# Altium PCB Flir_PCB.PcbDoc
Units mm, origin at the board's own origin, x right, y up, seen from the top; angles counter-clockwise.
Board outline 30 x 30 mm, 2 copper layers (Top Layer, Bottom Layer); 10 components, 38 nets, 108 pads, 35 vias.
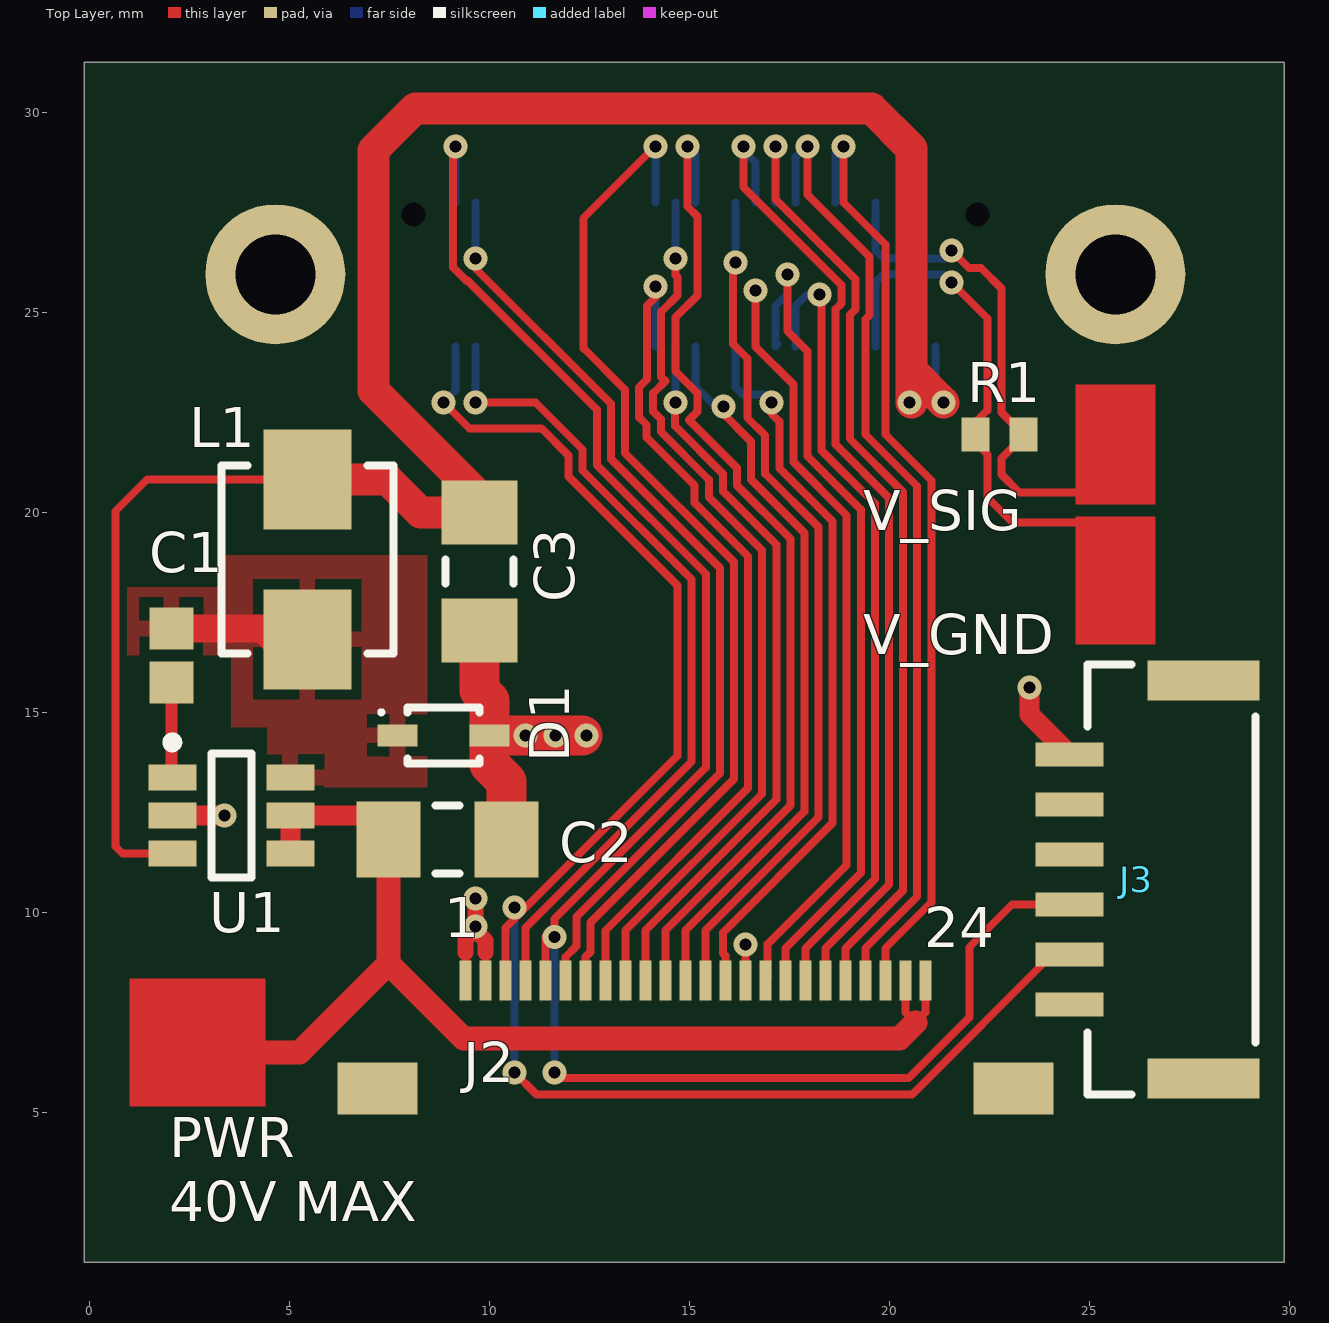
[diagram p0: Top Layer view]
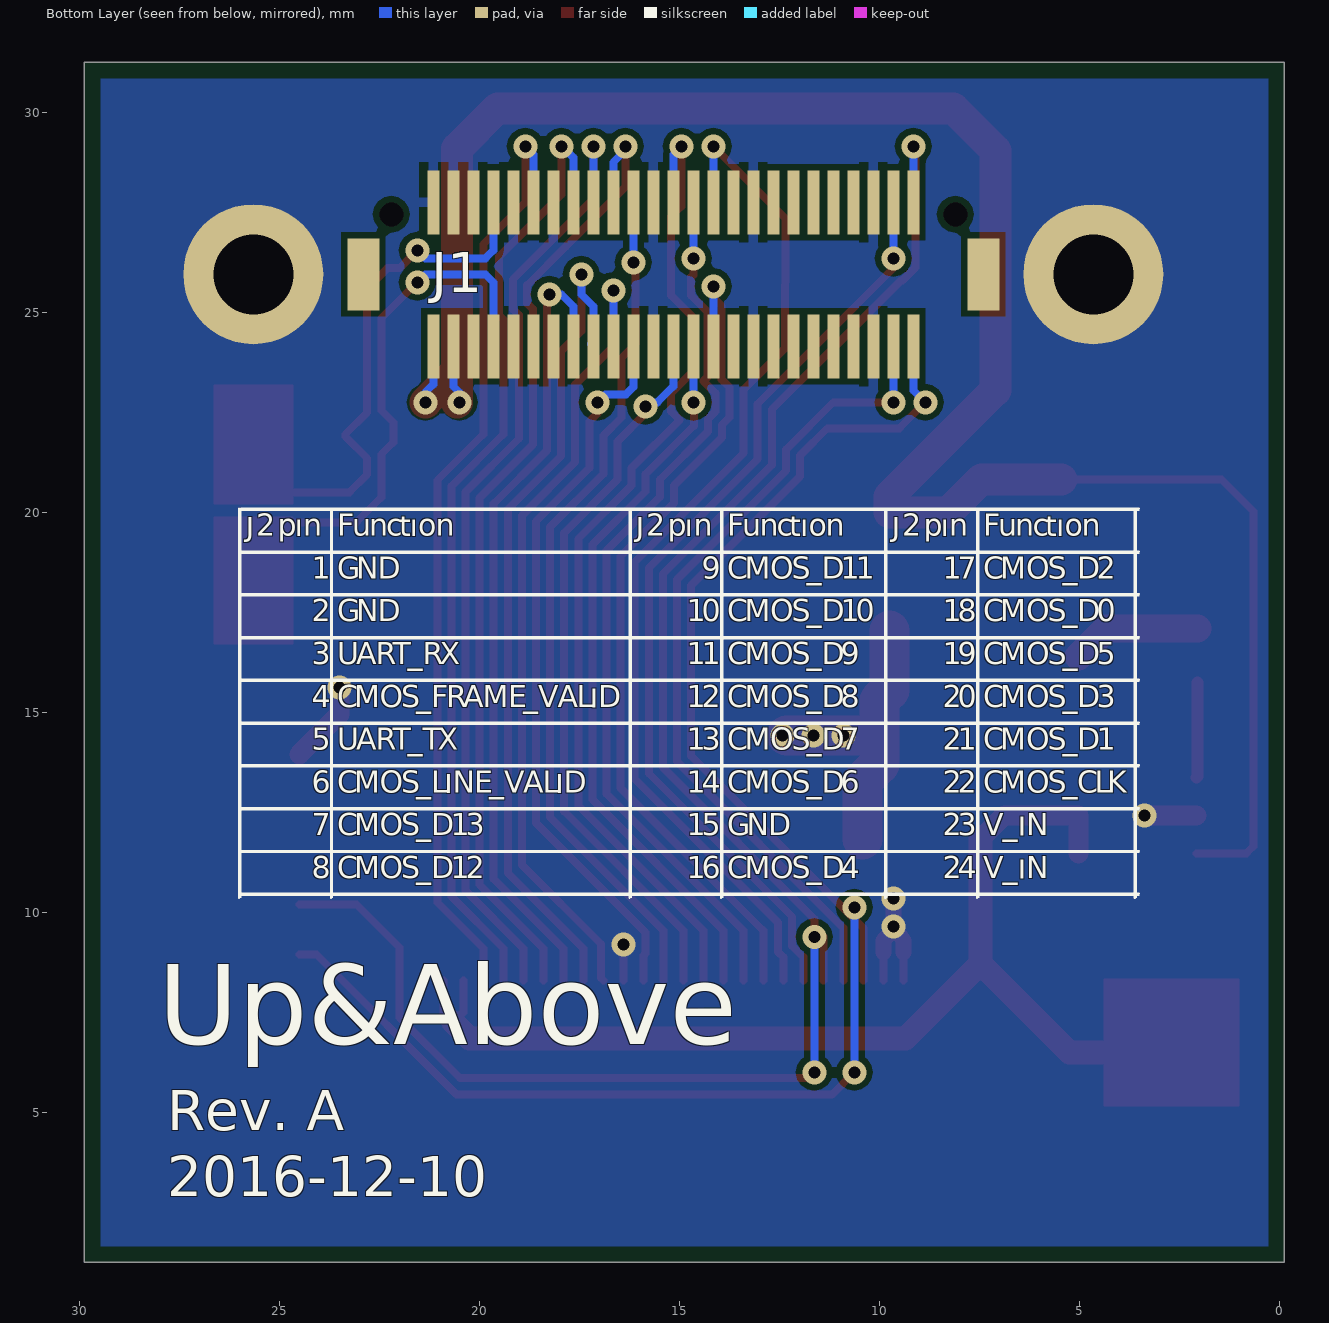
[diagram p1: Bottom Layer view, seen from below]
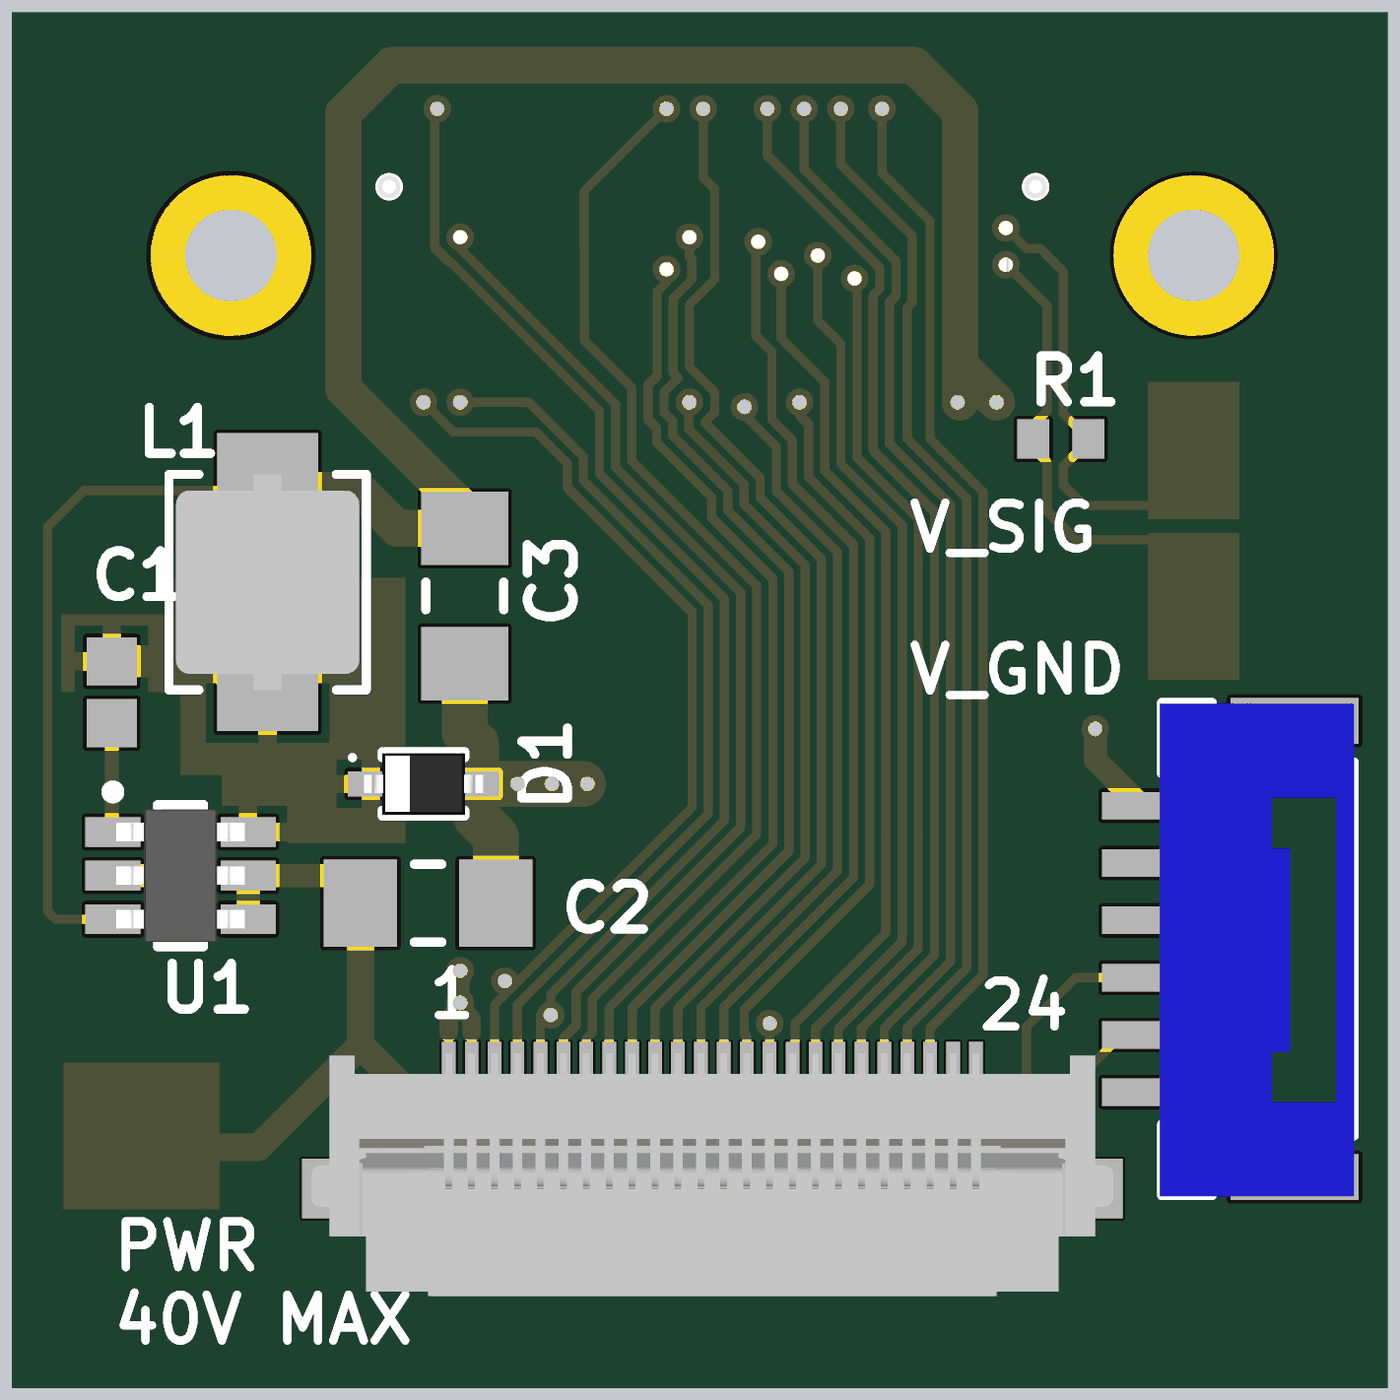
[diagram p2: 3D render of the assembled board from above, using the file's embedded part models]

## Layer stack, top to bottom
Top Solder: solder mask 0.0102, Solder Resist, Dk 3.5
Top Layer: signal copper 0.0356
Dielectric 1: dielectric 0.32, FR-4, Dk 4.8
Bottom Layer: signal copper 0.0356
Bottom Solder: solder mask 0.0102, Solder Resist, Dk 3.5

## Board outline
-0.125,1.25 29.875,1.25 29.875,31.25 -0.125,31.25

## Design rules (kind name [scope] priority, off if disabled: settings)
BoardOutlineClearance [All] p1: gap=0.4
Clearance [All] p1: gap=0.152
DiffPairsRouting [All] p1: maxlimit=0.254 minlimit=0.152 mostfreqgap=0.2 toplayer_minwidth=0.152 toplayer_maxwidth=0.381 toplayer_prefwidth=0.2 bottomlayer_minwidth=0.152 bottomlayer_maxwidth=0.381 bottomlayer_prefwidth=0.2 maxuncoupledlength=12.7
HoleSize [All] p1: absolutevalues=TRUE maxlimit=6.35 minlimit=0.3 maxpercent=80.000 minpercent=20.000
HoleToHoleClearance [All] p1: gap=0.2 allowstackedmicrovias=FALSE
MinimumSolderMaskSliver [All] p1: minsoldermaskwidth=0.1
PolygonConnect FlirMountHoles [InNet('DGND') AND HoleDiameter = 2.0] p1: connectstyle=Direct reliefconductorwidth=0.254 reliefentries=4 polygonreliefangle="90 Angle" airgapwidth=0.254
PolygonConnect FlirMountHoles_1 [InComponent('J1')] p2: connectstyle=Relief reliefconductorwidth=0.25 reliefentries=4 polygonreliefangle="90 Angle" airgapwidth=0.2
PolygonConnect Polygon_Via [IsVia] p3: connectstyle=Direct reliefconductorwidth=0.25 reliefentries=4 polygonreliefangle="90 Angle" airgapwidth=0.25
PolygonConnect [All] p4: connectstyle=Relief reliefconductorwidth=0.4 reliefentries=4 polygonreliefangle="90 Angle" airgapwidth=0.25
RoutingVias [All] p1: holewidth=0.3 width=0.5 viastyle="Through Hole" minholewidth=0.3 minwidth=0.5 maxholewidth=6.35 maxwidth=6
SilkToSilkClearance [All] p1: silktosilkclearance=0
SilkToSolderMaskClearance [IsPad] p1: minsilkscreentomaskgap=0.178 clearancetoexposedcopper=TRUE
SolderMaskExpansion SolderMaskExpansion_1 [InComponent('U7')] p1: expansion=0.05
SolderMaskExpansion [All] p2: expansion=0.08
Width [All] p1: maxlimit=6 minlimit=0.152 preferedwidth=0.2
24 further rules are at their usual default settings.

## Classes and differential pairs
differential pair LVDS_SYNC: +LVDS_SYNC_P -LVDS_SYNC_N
differential pair LVDS_DATA2: +LVDS_DATA2_P -LVDS_DATA2_N
differential pair LVDS_DATA1: +LVDS_DATA1_P -LVDS_DATA1_N
differential pair LVDS_CLK: +LVDS_CLK_P -LVDS_CLK_N

## Components (designator, comment, footprint, x,y, rotation, side; value= is the part's Value field where it differs from the comment)
C1 "VJ0603Y104JXJPW1BC" 0603C_L 2.05,16.425 r270 top
C2 "GRM31CR61H106MA12L" 1206_1.6_L 8.95,11.825 r180 top
C3 "TMK316B7106KL-TD" 1206_1.6_L 9.75,18.525 r90 top
D1 "PMEG6010CEJ" SOD323M 8.85,14.425 r0 top
J1 "DF12(3.0)-50DP-0.5V(86)" DF12(3.0)-50DP-0.5V(86) 15.15,25.95 r180 bottom
J2 "505278-2433" 505278-2433 15.15,6.95 r0 top
J3 "BM06B-GHS-TBT(LF)(SN)(N)" BM06B-GHS-TBT 24.5,7.7 r90 top
L1 "SRP4012TA-8R2M" INDP4541X12M 5.45,18.825 r90 top
R1 "CRCW060375R0FKEA" 0603R_0.45_H 22.75,21.95 r180 top
U1 "LMR16006YQ5DDCRQ1" SOT95P280X110-6M 3.55,12.425 r0 top

## Footprints (in the part's own frame and the unit in brackets; to place one, negate y for a bottom-side part, rotate by r counter-clockwise, add the part's x,y. Pads: shape width x height; smd on the part's side, far side on the other; paste and mask are expansions set on the pad)
0603C_L [mm] "Chip Capacitor, 2-Leads, IPC Low Density"
  rect 1.05x1.1 smd: 1(-0.675,0) 2(0.675,0)
  body extent -0.9,-0.5 0.9,0.5, height 1
0603R_0.45_H [mm] "Chip Resistor, 2-Leads, IPC Hight Density"
  rect 0.7x0.85 smd: 1(-0.6,0) 2(0.6,0)
  body extent -0.82,-0.48 0.83,0.48, height 0.5
1206_1.6_L [mm] "Chip Capacitor, 2-Leads, IPC Low Density"
  rect 1.6x1.9 smd: 1(-1.475,0) 2(1.475,0)
  silkscreen extent -0.3,-0.85 0.3,0.85, body extent -1.68,-0.87 1.67,0.87, height 1.8
505278-2433 [mm]
  rect 2x1.3 smd mask+0.05: 0(-7.95,-1.35) 0(7.95,-1.35)
  rect 0.3x1 smd mask+0.05: 1(-5.75,1.35) 2(-5.25,1.35) 3(-4.75,1.35) 4(-4.25,1.35) 5(-3.75,1.35) 6(-3.25,1.35) 7(-2.75,1.35) 8(-2.25,1.35) 9(-1.75,1.35) 10(-1.25,1.35) 11(-0.75,1.35) 12(-0.25,1.35) 13(0.25,1.35) 14(0.75,1.35) 15(1.25,1.35) 16(1.75,1.35) 17(2.25,1.35) 18(2.75,1.35) 19(3.25,1.35) 20(3.75,1.35) 21(4.25,1.35) 22(4.75,1.35) 23(5.25,1.35) 24(5.75,1.35)
  body extent -8.75,-3.7 8.75,1.6, height 1.88
BM06B-GHS-TBT [mm] "Vertical"
  rect 1x2.8 smd: 0(-1.85,-3.35) 0(8.1,-3.35)
  rect 0.6x1.7 smd: 1(0,0) 2(1.25,0) 3(2.5,0) 4(3.75,0) 5(5,0) 6(6.25,0)
  silkscreen extent -2.25,-4.65 8.5,-0.45, body extent -2.28,-4.65 8.48,0.3, height 3.88
DF12(3.0)-50DP-0.5V(86) [mm] "Board-to-board"
  rect 0.8x1.8 smd: 0(-7.75,0) 0(7.75,0)
  round 0 hole 0.6 unplated: 0(-7.05,1.5) 0(7.05,1.5)
  rect 0.3x1.6 smd mask+0.05: 1(6,1.8) 2(6,-1.8) 3(5.5,1.8) 4(5.5,-1.8) 5(5,1.8) 6(5,-1.8) 7(4.5,1.8) 8(4.5,-1.8) 9(4,1.8) 10(4,-1.8) 11(3.5,1.8) 12(3.5,-1.8) 13(3,1.8) 14(3,-1.8) 15(2.5,1.8) 16(2.5,-1.8) 17(2,1.8) 18(2,-1.8) 19(1.5,1.8) 20(1.5,-1.8) 21(1,1.8) 22(1,-1.8) 23(0.5,1.8) 24(0.5,-1.8) 25(0,1.8) 26(0,-1.8) 27(-0.5,1.8) 28(-0.5,-1.8) 29(-1,1.8) 30(-1,-1.8) 31(-1.5,1.8) 32(-1.5,-1.8) 33(-2,1.8) 34(-2,-1.8) 35(-2.5,1.8) 36(-2.5,-1.8) 37(-3,1.8) 38(-3,-1.8) 39(-3.5,1.8) 40(-3.5,-1.8) 41(-4,1.8) 42(-4,-1.8) 43(-4.5,1.8) 44(-4.5,-1.8) 45(-5,1.8) 46(-5,-1.8) 47(-5.5,1.8) 48(-5.5,-1.8) 49(-6,1.8) 50(-6,-1.8)
  body extent -7.8,-2.3 7.8,2.3, height 2.3
INDP4541X12M [mm] "Precision Wire Wound Inductor, 2-Leads, Body 4,45x4,06mm, IPC Low Density"
  rect 2.5x2.2 smd: 1(-2,0) 2(2,0)
  silkscreen extent -2.35,-2.15 2.35,2.15, body extent -2.35,-2 2.35,2, height 0.9
SOD323M [mm] "SODFL, 2-Leads, Body 1,25x2,50mm, IPC Low Density"
  rect 1x0.55 smd: 1(-1.15,0) 2(1.15,0)
  silkscreen extent -1.6,-0.7 0.9,0.7, body extent -1.3,-0.67 1.3,0.68, height 1.1
SOT95P280X110-6M [mm] "SOT23, 6-Leads, Body 2,90x2,80mm, Pitch 0,95mm, IPC Low Density"
  rect 1.2x0.65 smd: 1(-1.475,0.95) 2(-1.475,0) 3(-1.475,-0.95) 4(1.475,-0.95) 5(1.475,0) 6(1.475,0.95)
  silkscreen extent -1.6,-1.55 0.5,1.95, body extent -1.4,-1.45 1.4,1.45, height 0.97

## Part data
C1: "CAP CER 0603 0.1uF 16V X7R 5%"
C2: "CAP CER 1206 10uF 50V X5R 20%"
C3: "CAP CER 1206 10uF 25V X7R 10%"
D1: library part PMEG6010CEJ,115, "DIODE SCHOTTKY 60V 1A SOD323F"
J1: "Board to Board & Mezzanine Connectors 50P V SMT DR HDR 3.0MM STACK HT GOLD"
J2: library part 5052782433, "0.5 FFC ZIF BTM CONT EMBT PKG 24"
J3: "CONN HEADER GH TOP 6POS 1.25MM"
L1: "FIXED IND 8.2UH 1.4A 376 MOHM"
R1: "RES SMD 75 OHM 1% 1/10W 0603"
U1: "IC REG BUCK 5V 0.6A 6SOT"

## Free pads (board coordinates)
  round 3.5 hole 2 mask+0.1: 0(4.65,25.95)
  round 3.5 hole 2: 0(25.65,25.95)

## Via types
v1: diameter 0.6, hole 0.3, Top Layer to Bottom Layer, tented both sides, 35 vias

## Nets (pads, with @x,y where several pads share a name; then routed paths per layer and width w, separated by ;. In a path a pad name is that pad's centre, name@x,y a point inside that pad or via, vN(x,y) a via of type N, cw(c..) or ccw(c..) an arc to the next point about the centre after c; other vN are vias at no path point)
3V3_FLIR_OUT: J1.46
5V: C3.2 J1.48 J1.50 L1.2 U1.3 | length 54.5
  Top Layer w0.2: U1.3 0.825,11.475 0.65,11.65 0.65,20.025 1.45,20.825 L1.2
  Top Layer w0.8: L1.2 7.45,20.825 8.275,20 C3.2 9.75,20.4 7.1,23.05 7.1,29.05 8.15,30.1 19.55,30.1 20.552,29.098 20.552,23.548 ; v1@20.552,22.75 20.552,23.548 ; v1(21.35,22.75) 20.552,23.548
  Bottom Layer w0.2: v1(20.5,22.75) 20.5,23 20.65,23.15 J1.48 ; J1.50 21.15,23.2 21.35,23 v1(21.35,22.75)
DGND: C2.1 C3.1 D1.2 J1.5 J1.6 J1.17 J1.18 J1.27 J1.28 J1.37 J1.38 J1.41 J1.42 J1.45 J1.47 J1.49 J2.1 J2.2 J2.15 J3.6 pad.0 U1.2 | length 15.5
  Top Layer w0.2: J2.1 9.4,9 ; J2.2 9.9,9 ; J2.15 v1@16.4,9.1
  Top Layer w0.4: 9.4,9 9.4,9.3 v1(9.65,9.65) v1(9.65,10.35) ; v1@9.65,9.55 9.9,9.3 9.9,9
  Top Layer w0.5: U1.2 v1(3.375,12.425) ; v1(23.5,15.625) 23.5,14.95 J3.6
  Top Layer w1: C3.1 9.75,15.55 10,15.3 D1.2 ; C2.1 10.425,13.275 10,13.7 D1.2 ; v1@12.325,14.425 v1(11.65,14.425) v1(10.9,14.425) D1.2
  other v1: 16.4,9.2 12.425,14.425
LVDS_CLK_N: J1.10
LVDS_CLK_P: J1.9
LVDS_DATA1_N: J1.14
LVDS_DATA1_P: J1.13
LVDS_DATA2_N: J1.16
LVDS_DATA2_P: J1.15
LVDS_SYNC_N: J1.12
LVDS_SYNC_P: J1.11
NetC1_1: C1.1 D1.1 L1.1 U1.6 | length 3.3
  Top Layer w0.7: C1.1 4.325,17.1 L1.1@5.025,16.4
NetC1_2: C1.2 U1.1 | length 2.4
  Top Layer w0.3: C1.2 2.05,13.4 U1.1
UART_RX: J1.2 J2.3 J3.2 | length 40.9
  Top Layer w0.2: v1(8.85,22.75) 9.5,22.1 11.302,22.1 11.983,21.418 11.983,20.895 14.707,18.171 14.707,13.914 10.4,9.607 J2.3 ; v1(10.625,6) 11.177,5.448 20.573,5.448 24.075,8.95 J3.2
  Bottom Layer w0.2: v1(8.85,22.75) 9.15,23.05 J1.2 ; v1(10.625,6) v1(10.625,10.125)
UART_TX: J1.1 J2.5 J3.3 | length 45.6
  Top Layer w0.2: v1(9.15,29.15) 9.098,29.098 9.098,26.121 9.421,25.798 9.458,25.798 12.688,22.567 12.688,21.187 15.412,18.463 15.412,13.622 11.625,9.835 v1(11.625,9.385) ; J2.5 v1@11.4,9.385 ; v1(11.625,6) 11.773,5.852 20.479,5.852 22,7.373 22,9.125 23.075,10.2 J3.3
  Bottom Layer w0.2: J1.1 v1(9.15,29.15) ; v1(11.625,6) v1(11.625,9.385)
V_IN: C2.2 J2.23 J2.24 U1.4 U1.5 | length 28.8
  Top Layer w0.2: J2.23 20.4,7.5 20.65,7.25 20.9,7.5 J2.24
  Top Layer w0.5: U1.4 U1.5 6.875,12.425 C2.2
  Top Layer w0.6: 2.8,6.5 5.25,6.5 7.475,8.725 ; C2.2 7.475,8.725 ; 20.65,7.25 20.25,6.85 9.35,6.85 7.475,8.725
VIDEO_H: J1.43 R1.1 | length 12
  Top Layer w0.2: v1(21.55,26.55) 21.998,26.102 22.296,26.102 22.802,25.596 22.802,22.498 R1.1 23.35,21.898 22.802,21.35 22.802,20.948 23.25,20.5 24.875,20.5
  Bottom Layer w0.2: J1.43 19.65,26.55 19.85,26.35 v1@21.35,26.35
VIDEO_L: J1.44 R1.2 | length 12.3
  Top Layer w0.2: v1(21.55,25.75) 22.45,24.85 22.45,22.55 22.15,22.25 R1.2 22.15,21.75 22.45,21.45 22.45,20.375 23.075,19.75 25.125,19.75
  Bottom Layer w0.2: J1.44 19.65,25.75 19.85,25.95 v1@21.35,25.95
XP_CLK1: J1.39 J2.22 | length 23.7
  Top Layer w0.2: v1(18.85,29.15) 18.85,27.75 19.9,26.7 19.9,21.95 21.05,20.8 21.05,10.25 19.9,9.1 J2.22
  Bottom Layer w0.2: J1.39 18.65,28.95 v1(18.85,29.15)
XP_CLK2: J1.40
XP_D0: J1.36 J2.18 | length 20.2
  Top Layer w0.2: J2.18 17.9,9.095 19.64,10.835 19.64,20.215 18.307,21.548 18.307,25.393 v1(18.25,25.45)
  Bottom Layer w0.2: J1.36 17.65,25.15 17.95,25.45 v1(18.25,25.45)
XP_D1: J1.35 J2.21 | length 24.1
  Top Layer w0.2: v1(17.95,29.15) 17.95,27.947 19.507,26.389 19.507,24.929 19.4,24.822 19.4,21.95 20.698,20.652 20.698,10.398 19.4,9.1 J2.21
  Bottom Layer w0.2: J1.35 17.65,28.869 17.931,29.15 v1(17.95,29.15)
XP_D2: J1.34 J2.17 | length 21.2
  Top Layer w0.2: J2.17 17.4,9.093 19.288,10.981 19.288,20.069 17.955,21.402 17.955,24.029 17.45,24.533 v1(17.45,25.95)
  Bottom Layer w0.2: J1.34@17.202,24.202 J1.34 17.15,25.15 17.45,25.45 v1(17.45,25.95)
XP_D3: J1.33 J2.20 | length 24.3
  Top Layer w0.2: v1(17.15,29.15) 17.15,27.829 19.155,25.825 19.155,25.075 19.012,24.932 19.012,21.84 20.345,20.506 20.345,10.544 18.9,9.098 J2.20
  Bottom Layer w0.2: J1.33 v1(17.15,29.15)
XP_D4: J1.32 J2.16 | length 20.4
  Top Layer w0.2: v1(16.65,25.55) 16.65,24.148 17.602,23.196 17.602,21.256 18.936,19.923 18.936,11.186 16.952,9.202 16.952,8.352 J2.16
  Bottom Layer w0.2: J1.32 v1(16.65,25.55)
XP_D5: J1.31 J2.19 | length 24.7
  Top Layer w0.2: v1(16.35,29.15) 16.35,28.131 16.65,27.831 17.831,26.65 18.802,25.679 18.802,25.221 18.66,25.078 18.66,21.694 19.993,20.36 19.993,10.69 18.4,9.097 J2.19
  Bottom Layer w0.2: v1(16.35,29.15) 16.35,29.05 16.65,28.75 J1.31
XP_D6: J1.30 J2.14 | length 18.3
  Top Layer w0.2: J2.14 15.9,8.919 15.848,8.971 15.848,9.498 18.583,12.233 18.583,19.777 17.25,21.11 17.25,22.267 17.05,22.467 v1(17.05,22.75)
  Bottom Layer w0.2: J1.30 16.15,23.131 16.331,22.95 16.85,22.95 v1(17.05,22.75)
XP_D7: J1.29 J2.13 | length 21.5
  Top Layer w0.2: J2.13 15.4,9.548 18.231,12.379 18.231,19.631 16.898,20.964 16.898,21.918 16.45,22.366 16.45,23.85 16.098,24.202 16.098,26.198 v1(16.15,26.25)
  Bottom Layer w0.2: v1(16.15,26.25) J1.29@16.15,27.75
XP_D8: J1.26 J2.12 | length 18.4
  Top Layer w0.2: J2.12 14.9,9.547 17.878,12.525 17.878,19.485 16.545,20.818 16.545,21.772 15.85,22.467 v1(15.85,22.65)
  Bottom Layer w0.2: J1.26 15.15,23.15 15.55,22.75 15.85,22.75 v1(15.85,22.65)
XP_D9: J1.25 J2.11 | length 25.3
  Top Layer w0.2: J2.11 14.4,9.545 17.526,12.671 17.526,19.339 16.193,20.672 16.193,21.107 14.991,22.309 15.202,22.521 15.202,22.979 14.65,23.531 14.65,24.87 15.202,25.423 15.202,27.398 14.95,27.65 v1(14.95,29.15)
  Bottom Layer w0.2: v1(14.95,29.15) 15.15,28.95 J1.25
XP_D10: J1.24 J2.10 | length 18.3
  Top Layer w0.2: J2.10 13.9,9.543 17.174,12.817 17.174,19.193 15.84,20.526 15.84,20.961 14.638,22.163 14.638,22.738 v1(14.65,22.75)
  Bottom Layer w0.2: v1(14.65,22.75) J1.24
XP_D11: J1.23 J2.9 | length 22.4
  Top Layer w0.2: J2.9 13.4,9.542 16.821,12.963 16.821,19.047 15.488,20.38 15.488,20.815 14.286,22.017 14.286,22.333 14.098,22.521 14.098,22.979 14.401,23.282 14.298,23.385 14.298,25.016 14.702,25.421 14.702,25.879 14.65,25.931 v1(14.65,26.35)
  Bottom Layer w0.2: v1(14.65,26.35) J1.23@14.65,27.75
XP_D12: J1.22 J2.8 | length 21.6
  Top Layer w0.2: J2.8 12.9,9.54 16.469,13.109 16.469,18.901 15.136,20.234 15.136,20.669 13.933,21.872 13.933,22.187 13.745,22.375 13.745,23.125 13.945,23.325 13.945,25.162 14.15,25.367 v1(14.15,25.65)
  Bottom Layer w0.2: J1.22 v1(14.15,25.65)
XP_D13: J1.21 J2.7 | length 26.1
  Top Layer w0.2: J2.7 12.4,8.881 12.53,9.01 12.53,9.743 16.116,13.33 16.116,18.755 13.393,21.478 13.393,23.066 12.359,24.1 12.35,27.35 v1(14.15,29.15)
  Bottom Layer w0.2: J1.21 v1(14.15,29.15)
XP_D14: J1.20
XP_D15: J1.19
XP_D16: J1.4 J2.4 | length 20.7
  Top Layer w0.2: v1(9.65,22.75) 11.15,22.75 12.336,21.564 12.336,21.041 15.059,18.317 15.059,13.768 10.9,9.608 J2.4
  Bottom Layer w0.2: v1(9.65,22.75) J1.4
XP_D17: J1.3 J2.6 | length 23.6
  Top Layer w0.2: v1(9.65,26.35) 9.65,26.104 13.04,22.713 13.04,21.332 15.764,18.609 15.764,13.476 12.177,9.889 12.177,9.156 11.9,8.879 J2.6
  Bottom Layer w0.2: v1(9.65,26.35) J1.3@9.65,27.75
pads on no net: J1.0 J1.7 J1.8 J2.0 J3.0 J3.1 J3.4 J3.5

## Polygon pours and split planes (outlines as drawn)
DGND on Bottom Layer "DGND_L02_P002" (solid, pour order 2): 0,31.25 0,0 29.75,0 29.75,31.25
NetC1_1 on Top Layer "NETC1_1_L01_P000" (solid, pour order 0): 4.45,13.125 4.45,14.625 3.55,14.625 3.55,16.425 0.95,16.425 0.95,18.125 3.35,18.125 3.35,18.925 8.45,18.925 8.45,13.125

## Other copper
Top Layer:
  rectangle net V_IN: 1,5.15 4.4,8.35
  rectangle net VIDEO_L: 24.65,16.7 26.65,19.9
  rectangle net VIDEO_H: 24.65,20.2 26.65,23.2

## Silkscreen, mask and mechanical layers (free items; w line width, h text height)
Top Overlay:
  text "V_SIG" at 19.35,19.55 h1
  text "V_GND" at 19.35,16.45 h1
  text "1" at 8.875,9.375 h1
  text "24" at 20.875,9.125 h1
  text "PWR" at 2,3.875 h1
  text "40V MAX" at 2,2.275 h1
Bottom Overlay:
  drawing of 68 lines, arcs and shapes, not listed
  text "n" at 4.939,19.222 h0.93
  text "o" at 5.367,19.222 h0.93
  text "i" at 5.581,19.222 h0.93
  text "t" at 5.848,19.222 h0.93
  text "c" at 6.169,19.222 h0.93
  text "n" at 6.597,19.222 h0.93
  text "u" at 7.025,19.222 h0.93
  text "F" at 7.399,19.222 h0.93
  text "n" at 8.247,19.222 h0.93
  text "i" at 8.461,19.222 h0.93
  text "p" at 8.889,19.222 h0.93
  text "2" at 9.424,19.222 h0.93
  text "J" at 9.691,19.222 h0.93
  text "n" at 11.337,19.222 h0.93
  text "o" at 11.764,19.222 h0.93
  text "i" at 11.978,19.222 h0.93
  text "t" at 12.246,19.222 h0.93
  text "c" at 12.566,19.222 h0.93
  text "n" at 12.994,19.222 h0.93
  text "u" at 13.422,19.222 h0.93
  text "F" at 13.796,19.222 h0.93
  text "n" at 14.645,19.222 h0.93
  text "i" at 14.859,19.222 h0.93
  text "p" at 15.287,19.222 h0.93
  text "2" at 15.821,19.222 h0.93
  text "J" at 16.089,19.222 h0.93
  text "n" at 21.093,19.222 h0.93
  text "o" at 21.521,19.222 h0.93
  text "i" at 21.734,19.222 h0.93
  text "t" at 22.002,19.222 h0.93
  text "c" at 22.323,19.222 h0.93
  text "n" at 22.751,19.222 h0.93
  text "u" at 23.178,19.222 h0.93
  text "F" at 23.553,19.222 h0.93
  text "n" at 24.401,19.222 h0.93
  text "i" at 24.615,19.222 h0.93
  text "p" at 25.043,19.222 h0.93
  text "2" at 25.578,19.222 h0.93
  text "J" at 25.845,19.222 h0.93
  text "2" at 4.565,18.153 h0.93
  text "D" at 5.046,18.153 h0.93
  text "_" at 5.42,18.153 h0.93
  text "S" at 5.795,18.153 h0.93
  text "O" at 6.329,18.153 h0.93
  text "M" at 6.971,18.153 h0.93
  text "C" at 7.399,18.153 h0.93
  text "7" at 8.037,18.153 h0.93
  text "1" at 8.412,18.153 h0.93
  text "1" at 10.588,18.153 h0.93
  text "1" at 10.962,18.153 h0.93
  text "D" at 11.443,18.153 h0.93
  text "_" at 11.818,18.153 h0.93
  text "S" at 12.192,18.153 h0.93
  text "O" at 12.727,18.153 h0.93
  text "M" at 13.369,18.153 h0.93
  text "C" at 13.796,18.153 h0.93
  text "9" at 14.436,18.153 h0.93
  text "D" at 22.537,18.153 h0.93
  text "N" at 23.071,18.153 h0.93
  text "G" at 23.553,18.153 h0.93
  text "1" at 24.192,18.153 h0.93
  text "0" at 4.565,17.083 h0.93
  text "D" at 5.046,17.083 h0.93
  text "_" at 5.42,17.083 h0.93
  text "S" at 5.795,17.083 h0.93
  text "O" at 6.329,17.083 h0.93
  text "M" at 6.971,17.083 h0.93
  text "C" at 7.399,17.083 h0.93
  text "8" at 8.037,17.083 h0.93
  text "1" at 8.412,17.083 h0.93
  text "0" at 10.588,17.083 h0.93
  text "1" at 10.962,17.083 h0.93
  text "D" at 11.443,17.083 h0.93
  text "_" at 11.818,17.083 h0.93
  text "S" at 12.192,17.083 h0.93
  text "O" at 12.727,17.083 h0.93
  text "M" at 13.369,17.083 h0.93
  text "C" at 13.796,17.083 h0.93
  text "0" at 14.435,17.083 h0.93
  text "1" at 14.809,17.083 h0.93
  text "D" at 22.537,17.083 h0.93
  text "N" at 23.071,17.083 h0.93
  text "G" at 23.553,17.083 h0.93
  text "2" at 24.192,17.083 h0.93
  text "5" at 4.565,16.014 h0.93
  text "D" at 5.046,16.014 h0.93
  text "_" at 5.42,16.014 h0.93
  text "S" at 5.795,16.014 h0.93
  text "O" at 6.329,16.014 h0.93
  text "M" at 6.971,16.014 h0.93
  text "C" at 7.399,16.014 h0.93
  text "9" at 8.037,16.014 h0.93
  text "1" at 8.412,16.014 h0.93
  text "9" at 10.962,16.014 h0.93
  text "D" at 11.443,16.014 h0.93
  text "_" at 11.818,16.014 h0.93
  text "S" at 12.192,16.014 h0.93
  text "O" at 12.727,16.014 h0.93
  text "M" at 13.369,16.014 h0.93
  text "C" at 13.796,16.014 h0.93
  text "1" at 14.435,16.014 h0.93
  text "1" at 14.809,16.014 h0.93
  text "X" at 20.986,16.014 h0.93
  text "R" at 21.414,16.014 h0.93
  text "_" at 21.788,16.014 h0.93
  text "T" at 22.162,16.014 h0.93
  text "R" at 22.59,16.014 h0.93
  text "A" at 23.071,16.014 h0.93
  text "U" at 23.553,16.014 h0.93
  text "3" at 24.192,16.014 h0.93
  text "3" at 4.565,14.944 h0.93
  text "D" at 5.046,14.944 h0.93
  text "_" at 5.42,14.944 h0.93
  text "S" at 5.795,14.944 h0.93
  text "O" at 6.329,14.944 h0.93
  text "M" at 6.971,14.944 h0.93
  text "C" at 7.399,14.944 h0.93
  text "0" at 8.037,14.944 h0.93
  text "2" at 8.412,14.944 h0.93
  text "8" at 10.962,14.944 h0.93
  text "D" at 11.443,14.944 h0.93
  text "_" at 11.818,14.944 h0.93
  text "S" at 12.192,14.944 h0.93
  text "O" at 12.727,14.944 h0.93
  text "M" at 13.369,14.944 h0.93
  text "C" at 13.796,14.944 h0.93
  text "2" at 14.435,14.944 h0.93
  text "1" at 14.809,14.944 h0.93
  text "D" at 17.029,14.944 h0.93
  text "I" at 17.243,14.944 h0.93
  text "L" at 17.563,14.944 h0.93
  text "A" at 18.045,14.944 h0.93
  text "V" at 18.526,14.944 h0.93
  text "_" at 18.9,14.944 h0.93
  text "E" at 19.275,14.944 h0.93
  text "M" at 19.916,14.944 h0.93
  text "A" at 20.398,14.944 h0.93
  text "R" at 20.825,14.944 h0.93
  text "F" at 21.2,14.944 h0.93
  text "_" at 21.574,14.944 h0.93
  text "S" at 21.948,14.944 h0.93
  text "O" at 22.483,14.944 h0.93
  text "M" at 23.125,14.944 h0.93
  text "C" at 23.553,14.944 h0.93
  text "4" at 24.192,14.944 h0.93
  text "1" at 4.565,13.875 h0.93
  text "D" at 5.046,13.875 h0.93
  text "_" at 5.42,13.875 h0.93
  text "S" at 5.795,13.875 h0.93
  text "O" at 6.329,13.875 h0.93
  text "M" at 6.971,13.875 h0.93
  text "C" at 7.399,13.875 h0.93
  text "1" at 8.037,13.875 h0.93
  text "2" at 8.412,13.875 h0.93
  text "7" at 10.962,13.875 h0.93
  text "D" at 11.443,13.875 h0.93
  text "_" at 11.818,13.875 h0.93
  text "S" at 12.192,13.875 h0.93
  text "O" at 12.727,13.875 h0.93
  text "M" at 13.369,13.875 h0.93
  text "C" at 13.796,13.875 h0.93
  text "3" at 14.435,13.875 h0.93
  text "1" at 14.809,13.875 h0.93
  text "X" at 21.039,13.875 h0.93
  text "T" at 21.414,13.875 h0.93
  text "_" at 21.788,13.875 h0.93
  text "T" at 22.162,13.875 h0.93
  text "R" at 22.59,13.875 h0.93
  text "A" at 23.071,13.875 h0.93
  text "U" at 23.553,13.875 h0.93
  text "5" at 24.192,13.875 h0.93
  text "K" at 4.297,12.806 h0.93
  text "L" at 4.618,12.806 h0.93
  text "C" at 5.046,12.806 h0.93
  text "_" at 5.42,12.806 h0.93
  text "S" at 5.795,12.806 h0.93
  text "O" at 6.329,12.806 h0.93
  text "M" at 6.971,12.806 h0.93
  text "C" at 7.399,12.806 h0.93
  text "2" at 8.037,12.806 h0.93
  text "2" at 8.412,12.806 h0.93
  text "6" at 10.962,12.806 h0.93
  text "D" at 11.443,12.806 h0.93
  text "_" at 11.818,12.806 h0.93
  text "S" at 12.192,12.806 h0.93
  text "O" at 12.727,12.806 h0.93
  text "M" at 13.369,12.806 h0.93
  text "C" at 13.796,12.806 h0.93
  text "4" at 14.435,12.806 h0.93
  text "1" at 14.809,12.806 h0.93
  text "D" at 17.884,12.806 h0.93
  text "I" at 18.098,12.806 h0.93
  text "L" at 18.419,12.806 h0.93
  text "A" at 18.9,12.806 h0.93
  text "V" at 19.382,12.806 h0.93
  text "_" at 19.756,12.806 h0.93
  text "E" at 20.13,12.806 h0.93
  text "N" at 20.665,12.806 h0.93
  text "I" at 20.879,12.806 h0.93
  text "L" at 21.2,12.806 h0.93
  text "_" at 21.574,12.806 h0.93
  text "S" at 21.948,12.806 h0.93
  text "O" at 22.483,12.806 h0.93
  text "M" at 23.125,12.806 h0.93
  text "C" at 23.553,12.806 h0.93
  text "6" at 24.192,12.806 h0.93
  text "N" at 6.329,11.736 h0.93
  text "I" at 6.543,11.736 h0.93
  text "_" at 6.918,11.736 h0.93
  text "V" at 7.399,11.736 h0.93
  text "3" at 8.037,11.736 h0.93
  text "2" at 8.412,11.736 h0.93
  text "D" at 12.78,11.736 h0.93
  text "N" at 13.315,11.736 h0.93
  text "G" at 13.796,11.736 h0.93
  text "5" at 14.435,11.736 h0.93
  text "1" at 14.809,11.736 h0.93
  text "3" at 20.344,11.736 h0.93
  text "1" at 20.718,11.736 h0.93
  text "D" at 21.2,11.736 h0.93
  text "_" at 21.574,11.736 h0.93
  text "S" at 21.948,11.736 h0.93
  text "O" at 22.483,11.736 h0.93
  text "M" at 23.125,11.736 h0.93
  text "C" at 23.553,11.736 h0.93
  text "7" at 24.192,11.736 h0.93
  text "N" at 6.329,10.667 h0.93
  text "I" at 6.543,10.667 h0.93
  text "_" at 6.918,10.667 h0.93
  text "V" at 7.399,10.667 h0.93
  text "4" at 8.037,10.667 h0.93
  text "2" at 8.412,10.667 h0.93
  text "4" at 10.962,10.667 h0.93
  text "D" at 11.443,10.667 h0.93
  text "_" at 11.818,10.667 h0.93
  text "S" at 12.192,10.667 h0.93
  text "O" at 12.727,10.667 h0.93
  text "M" at 13.369,10.667 h0.93
  text "C" at 13.796,10.667 h0.93
  text "6" at 14.435,10.667 h0.93
  text "1" at 14.809,10.667 h0.93
  text "2" at 20.344,10.667 h0.93
  text "1" at 20.718,10.667 h0.93
  text "D" at 21.2,10.667 h0.93
  text "_" at 21.574,10.667 h0.93
  text "S" at 21.948,10.667 h0.93
  text "O" at 22.483,10.667 h0.93
  text "M" at 23.125,10.667 h0.93
  text "C" at 23.553,10.667 h0.93
  text "8" at 24.192,10.667 h0.93
  text "Up&Above" at 28.025,6.7 h2
  text "Rev. A" at 27.805,4.55 h1
  text "2016-12-10" at 27.805,2.9 h1
Bottom Solder:
  rectangle: 1,5.15 4.4,8.35
  lines w1: 6.197,23.35 6.197,28.35 ; 24.097,23.453 24.097,28.35 ; 6.197,28.35 cw(c5.46,28.387) 5.422,27.65 4.647,27.65 ccw(c4.65,25.95) 4.647,24.25 5.422,24.25 cw(c5.46,23.513) 6.197,23.55 6.197,22.9 ccw(c7.497,22.9) 7.497,21.6 22.797,21.6 ccw(c22.797,22.9) 24.097,22.9 24.097,23.55 cw(c24.835,23.513) 24.872,24.25 25.647,24.25 ccw(c25.645,25.95) 25.647,27.65 24.872,27.65 cw(c24.835,28.387) 24.097,28.35 ; 6.197,28.35 6.197,29 cw(c7.497,29) 7.497,30.3 22.797,30.3 cw(c22.797,29) 24.097,29 24.097,28.35
Board Outline:
  the board outline again, w0.15
Outlines From FLir:
  lines w0.15: 4.65,24.25 cw(c4.653,25.95) 4.65,27.65 5.425,27.65 ccw(c5.463,28.387) 6.2,28.35 6.2,29 cw(c7.5,29) 7.5,30.3 22.8,30.3 cw(c22.8,29) 24.1,29 24.1,28.35 ccw(c24.837,28.387) 24.875,27.65 25.65,27.65 cw(c25.647,25.95) 25.65,24.25 24.875,24.25 ccw(c24.837,23.513) 24.1,23.55 24.1,22.9 cw(c22.8,22.9) 22.8,21.6 7.5,21.6 cw(c7.5,22.9) 6.2,22.9 6.2,23.55 ccw(c5.463,23.513) 5.425,24.25 4.65,24.25

## Dimensions
-0.125,1.25 to -0.125,31.25 on Dimensions
-0.125,31.25 to 29.875,31.25 on Dimensions